# EAGLE board combo (EAGLE 9.6.2)
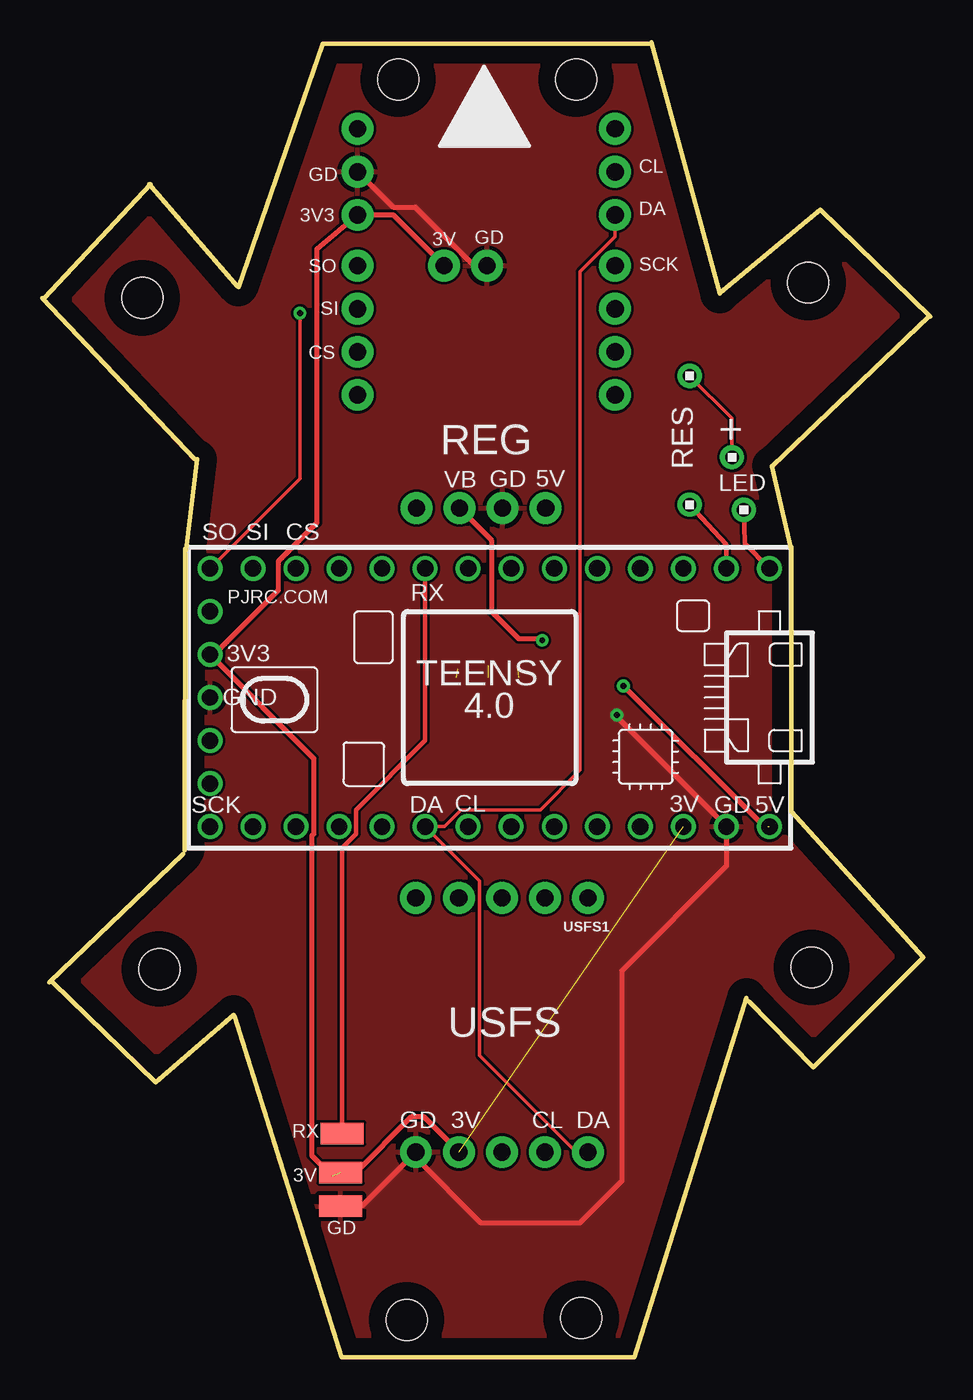
[diagram p0: board, top side]
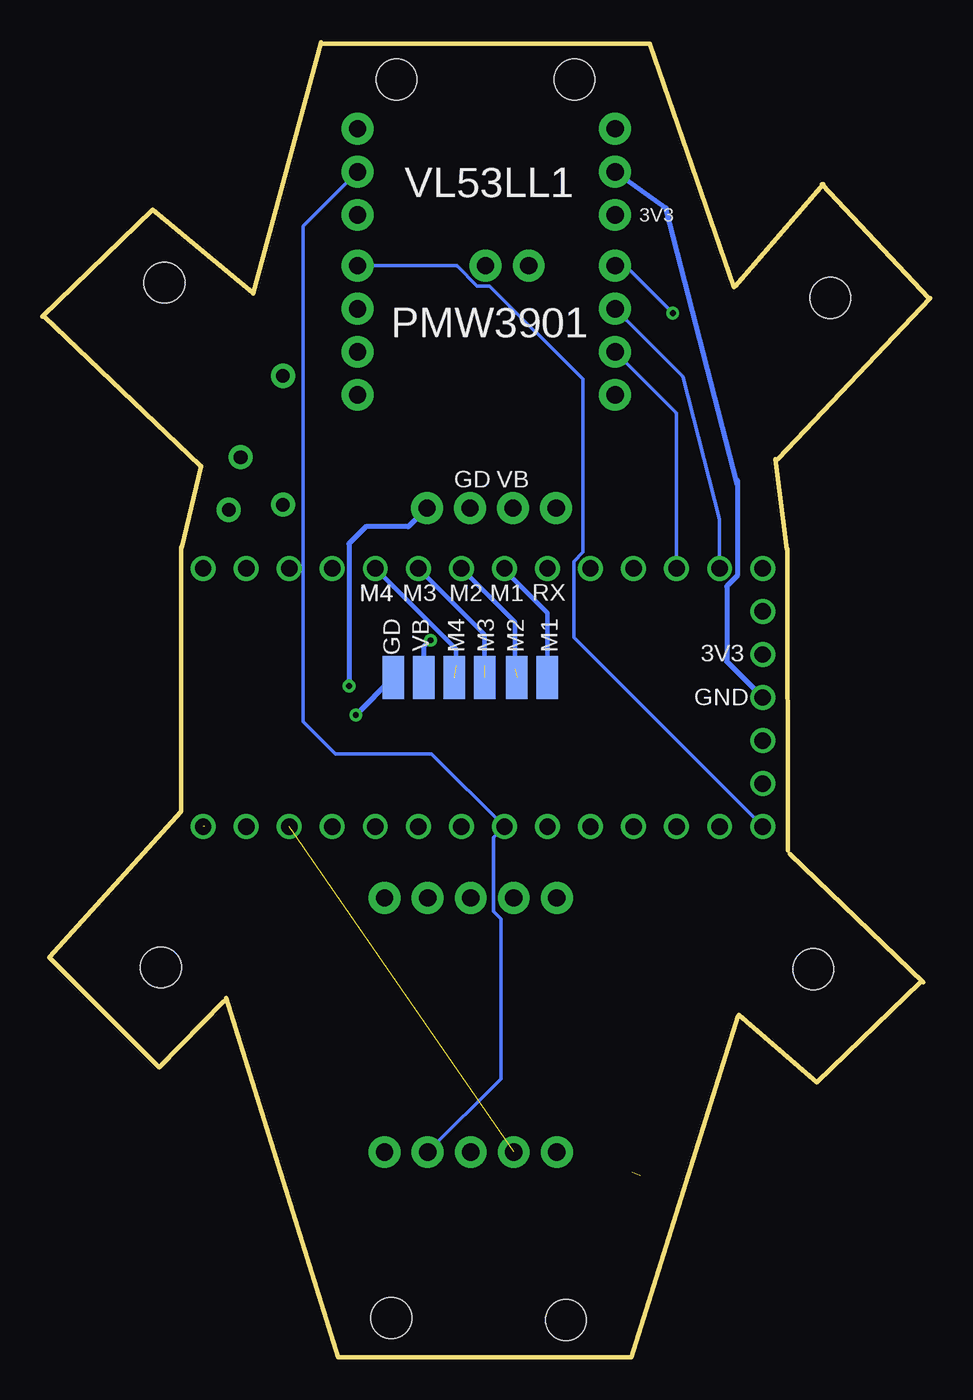
[diagram p1: board, bottom side, seen from below]

Size 52.4 x 77.58 mm. Coordinates in mm from the lower left corner, seen from the top.
Outline: 34.85,0 17.65,0 11.35,20.1
Outline: 8.42,47.72 8.4,29.9
Outline: 44.2,47.8 44.2,32.3
Outline: 43.04,52.58 44.18,47.75
Outline: 16.55,77.51 35.85,77.51
Outline: 52.3,61.4 43.1,52.6
Outline: 52.4,61.4 45.9,67.7 40,62.8
Outline: 35.94,77.58 39.98,62.75
Outline: 16.54,77.48 11.58,63.15
Outline: 9.14,52.98 8.48,47.65
Outline: 0,62.5 9,53
Outline: 6.3,69.2 11.5,63.2
Outline: 8.3,29.7 0.4,22.1
Outline: 0.6,22.1 6.7,16.2 11.3,20.2
Outline: 41.55,21.2 34.95,0
Outline: 41.7,21 45.5,17.1 52,23.6 44.2,32.2
Outline: 0.1,62.5 6.4,69.2
Copper layers (1*16): Top 0.035mm / dielectric 1.5mm / Bottom 0.035mm
Design rules "default": minimum track width 6mil, minimum drill 0.35mm, track to track 6mil, track to pad 6mil, pad to pad 6mil, via to via 6mil, smd to smd 6mil, copper to edge 40mil, drill to drill 6mil, minimum pad ring 10mil, minimum via ring 8mil, stop-mask expansion 4mil, vias tented up to drill 0mil, thermal gap 10mil
Holes 2.4 mm at 21,75.4 31.5,75.4 21.5,2.2 31.8,2.3 5.9,62.5 6.9,22.9 45.4,23 45.2,63.4

## Footprints (pad centres in the part's own frame; a part is rotated, then mirrored left to right if it is on the bottom)
SMD1,27-2,54 = smd 1.27 x 2.54: 1 0,0
1X04_NO_SILK = drill 1.016 pad 1.88: 1 0,0; 2 2.54,0; 3 5.08,0; 4 7.62,0
1X02_NO_SILK = drill 1.016 pad 1.88: 1 0,0; 2 2.54,0
TEENSY_4.0 = drill 0.965: 0/RX -13.97,-7.62; 1/TX -11.43,-7.62; 2 -8.89,-7.62; 3/CANTX -6.35,-7.62; 3V3_LN 16.51,-2.54; 3V3_LO -11.43,7.62; 4/CANRX -3.81,-7.62; 5 -1.27,-7.62; 6 1.27,-7.62; 7 3.81,-7.62; 8 6.35,-7.62; 9/CS 8.89,-7.62; 10/CS 11.43,-7.62; 11/MOSI 13.97,-7.62; 12/MISO 16.51,-7.62; 13/SCK 16.51,7.62; 14/A0 13.97,7.62; 15/A1 11.43,7.62; 16/A2 8.89,7.62; 17/A3 6.35,7.62; 18/A4/SDA 3.81,7.62; 19/A5/SCL 1.27,7.62; 20/A6 -1.27,7.62; 21/A7 -3.81,7.62; 22/A8 -6.35,7.62; 23/A9 -8.89,7.62; GND -16.51,-7.62; GND2 -13.97,7.62; GND3 16.51,0; ON/OFF 16.51,5.08; PROG 16.51,2.54; VBAT\ 16.51,-5.08; VIN -16.51,7.62
1X1 = drill 0.8 pad 1.422: 1 0,0
1X05_NO_SILK = drill 1.016 pad 1.88: 1 0,0; 2 2.54,0; 3 5.08,0; 4 7.62,0; 5 10.16,0
1X03_NO_SILK = drill 1.016 pad 1.88: 1 0,0; 2 2.54,0; 3 5.08,0

## Placement (x,y rotation side)
3V  [SMD1,27-2,54]  17.6,10.9 90 top
GD  [SMD1,27-2,54]  17.6,8.9 90 top
GND  [SMD1,27-2,54]  31.7,40.1 0 bottom
M1  [SMD1,27-2,54]  22.6,40.1 0 bottom
M2  [SMD1,27-2,54]  24.4,40.1 0 bottom
M3  [SMD1,27-2,54]  26.3,40.1 0 bottom
M4  [SMD1,27-2,54]  28.1,40.1 0 bottom
PMW1  [1X04_NO_SILK]  33.8,64.4 270 top
PMW2  [1X04_NO_SILK]  18.6,64.4 270 top
PMW3  [1X02_NO_SILK]  23.7,64.4 0 top
REG  [1X04_NO_SILK]  29.7,50.1 180 top
RX  [SMD1,27-2,54]  17.7,13.2 90 top
U$1  TEENSY_4.0  [TEENSY_4.0]  26.4,38.92 180 top
U$3  1X1  [1X1]  38.2,50.3 0 top
U$4  1X1  [1X1]  38.2,57.9 0 top
U$6  1X1  [1X1]  40.7,53.1 0 top
U$7  1X1  [1X1]  41.4,50 0 top
USFS  [1X05_NO_SILK]  32.2,12.1 180 top
USFS1  [1X05_NO_SILK]  32.2,27.1 180 top
VBAT  [SMD1,27-2,54]  29.9,40.1 0 bottom
VL1  [1X03_NO_SILK]  33.8,67.4 90 top
VL2  [1X03_NO_SILK]  18.6,67.4 90 top

## Library data of the parts
3V GD GND M1-M4 RX VBAT = wirepad
PMW1 PMW2 REG = SparkFun-Connectors; PROD_ID: CONN-09696
PMW3 USFS USFS1 VL1 VL2 = SparkFun-Connectors
U$1 = TEENSY 4.0
U$3 U$4 U$6 U$7 = headers(2mm)

## Nets
3V3: 3V.1 PMW3.1 U$1.3V3_LN U$1.3V3_LO USFS.4 VL2.1
5V: REG.1 U$1.VIN
CS: PMW2.3 U$1.10/CS
G2: U$1.GND U$7.1
GND: GD.1 GND.1 PMW3.2 REG.2 U$1.GND2 U$1.GND3 USFS.5 VL2.2
LED_R_IN: U$1.0/RX U$3.1
LED_R_OUT: U$4.1 U$6.1
M1: M1.1 U$1.6
M2: M2.1 U$1.5
M3: M3.1 U$1.4/CANRX
M4: M4.1 U$1.3/CANTX
MISO: PMW2.1 U$1.12/MISO
MOSI: PMW2.2 U$1.11/MOSI
RX: RX.1 U$1.7
SCK: PMW1.1 U$1.13/SCK
SCL: U$1.19/A5/SCL USFS.2 VL1.2
SDA: U$1.18/A4/SDA USFS.1 VL1.1
VBAT: REG.3 VBAT.1

## Tracks (layer width: path | path; a pad name or v marks a point on that pad's centre or on a via)
3V3  (2 unrouted)
  Top 0.305: 17.1,10.7 15.9,11.9 15.9,30.76 16.01,30.87 16.01,35.34 U$1.3V3_LN 10.13,41.46 13.93,45.26 13.93,46.97 16.2,49.24 16.2,65.4 VL2.1 20.7,67.4 PMW3.1 | 3V.1 18.5,10.9 21.8,14.2 22.5,14.2 24.58,12.12 USFS.4
5V  (via drill 0.35)  (1 unrouted)
  Top 0.305: v34.3,39.6 42.6,31.3 42.81,31.3
  Bottom 0.305: REG.1 30.8,49 33.3,49 34.3,48 v34.3,39.6
CS
  Bottom 0.203: PMW2.3 14.97,55.69 U$1.10/CS
G2
  Top 0.254: U$1.GND 41.45,48 U$7.1
GND  (via drill 0.35)
  Top 0.305: v33.9,37.9 33.9,37.77 U$1.GND2 40.37,28.97 34.2,22.8 34.2,10.4 31.7,7.9 25.9,7.9 22.02,11.78 22.02,12.08 | USFS.5 22.02,12.08 | 22.02,12.08 18.84,8.9 GD.1 | VL2.2 20.68,67.86 22,67.86 25.46,64.4 PMW3.2
  Bottom 0.305: U$1.GND3 12.01,41.04 12.01,45.49 11.39,46.11 11.39,51.5 | 11.39,51.75 11.39,51.5 | 11.39,51.5 15.6,67.8 VL2.2 | v33.9,37.9 GND.1
  pour Top: 59.95,80.26 59.95,-1.25 -8.5,-1.25 -8.5,80.26
LED_R_IN
  Top 0.254: U$3.1 40.37,47.94 U$1.0/RX
LED_R_OUT
  Top 0.203: U$4.1 40.7,55.4 U$6.1
M1
  Bottom 0.254: U$1.6 25.13,46.43 22.6,43.9 M1.1
M2  (1 unrouted)
  Bottom 0.254: U$1.5 24.5,43.37 24.5,40.6
M3  (1 unrouted)
  Bottom 0.254: U$1.4/CANRX 26.3,42.63 26.3,40.8
M4  (1 unrouted)
  Bottom 0.254: U$1.3/CANTX 28,41.79 28,40.8
MISO  (via drill 0.35)
  Top 0.203: U$1.12/MISO 15.2,51.85 v15.2,61.6
  Bottom 0.203: v15.2,61.6 18,64.4 PMW2.1
MOSI
  Bottom 0.203: PMW2.2 14.6,57.86 12.43,49.45 U$1.11/MOSI
RX
  Top 0.254: U$1.7 22.59,36.39 18.5,32.3 18.5,31.75 18.53,31.72 18.53,30.88 17.7,30.05 RX.1
SCK
  Bottom 0.203: 9.89,31.59 U$1.13/SCK 21.04,42.45 21.04,46.95 20.5,47.49 20.5,57.7 26.01,63.21 26.73,63.21 27.93,64.4 PMW1.1
SCL
  Bottom 0.203: VL1.2 37,66.74 37,37.5 35.1,35.6 29.43,35.6 U$1.19/A5/SCL 25.77,30.66 25.77,26.31 25.33,25.86 25.33,16.43 USFS.2
SDA
  Top 0.203: VL1.1 33.8,66.12 31.73,64.06 31.73,34.63 29.39,32.29 24.72,32.29 23.73,31.3 U$1.18/A4/SDA 25.8,28.09 25.8,17.8 31.5,12.1 USFS.1
VBAT  (via drill 0.35)
  Top 0.305: REG.3 26.5,48.22 26.5,44 28.1,42.4 29.4,42.4 v29.5,42.3
  Bottom 0.305: v29.5,42.3 29.9,41.9 VBAT.1

## Text on the board
tNames: CL | GD | 3V3 | DA | 3V | GD | SO | SCK | SI | CS | REG | + | RES | VB | GD | 5V | LED | SO | SI | CS | RX | 3V3 | GND | DA | CL | 3V | 5V | SCK | GD | USFS | RX | GD | 3V | CL | DA | 3V | GD
bNames: VL53LL1 | 3V3 | PMW3901 | VB | GD | RX | M1 | M2 | M3 | M4 | M4 | M1 | M2 | M3 | M4 | VB | GD | 3V3 | GND